# Altium PCB Indicators.PcbDoc
Units mil, origin at the board's own origin, x right, y up, seen from the top; angles counter-clockwise.
Board outline 1725 x 1775 mil, 2 copper layers (Top Layer, Bottom Layer); 24 components, 37 nets, 88 pads, 4 vias.
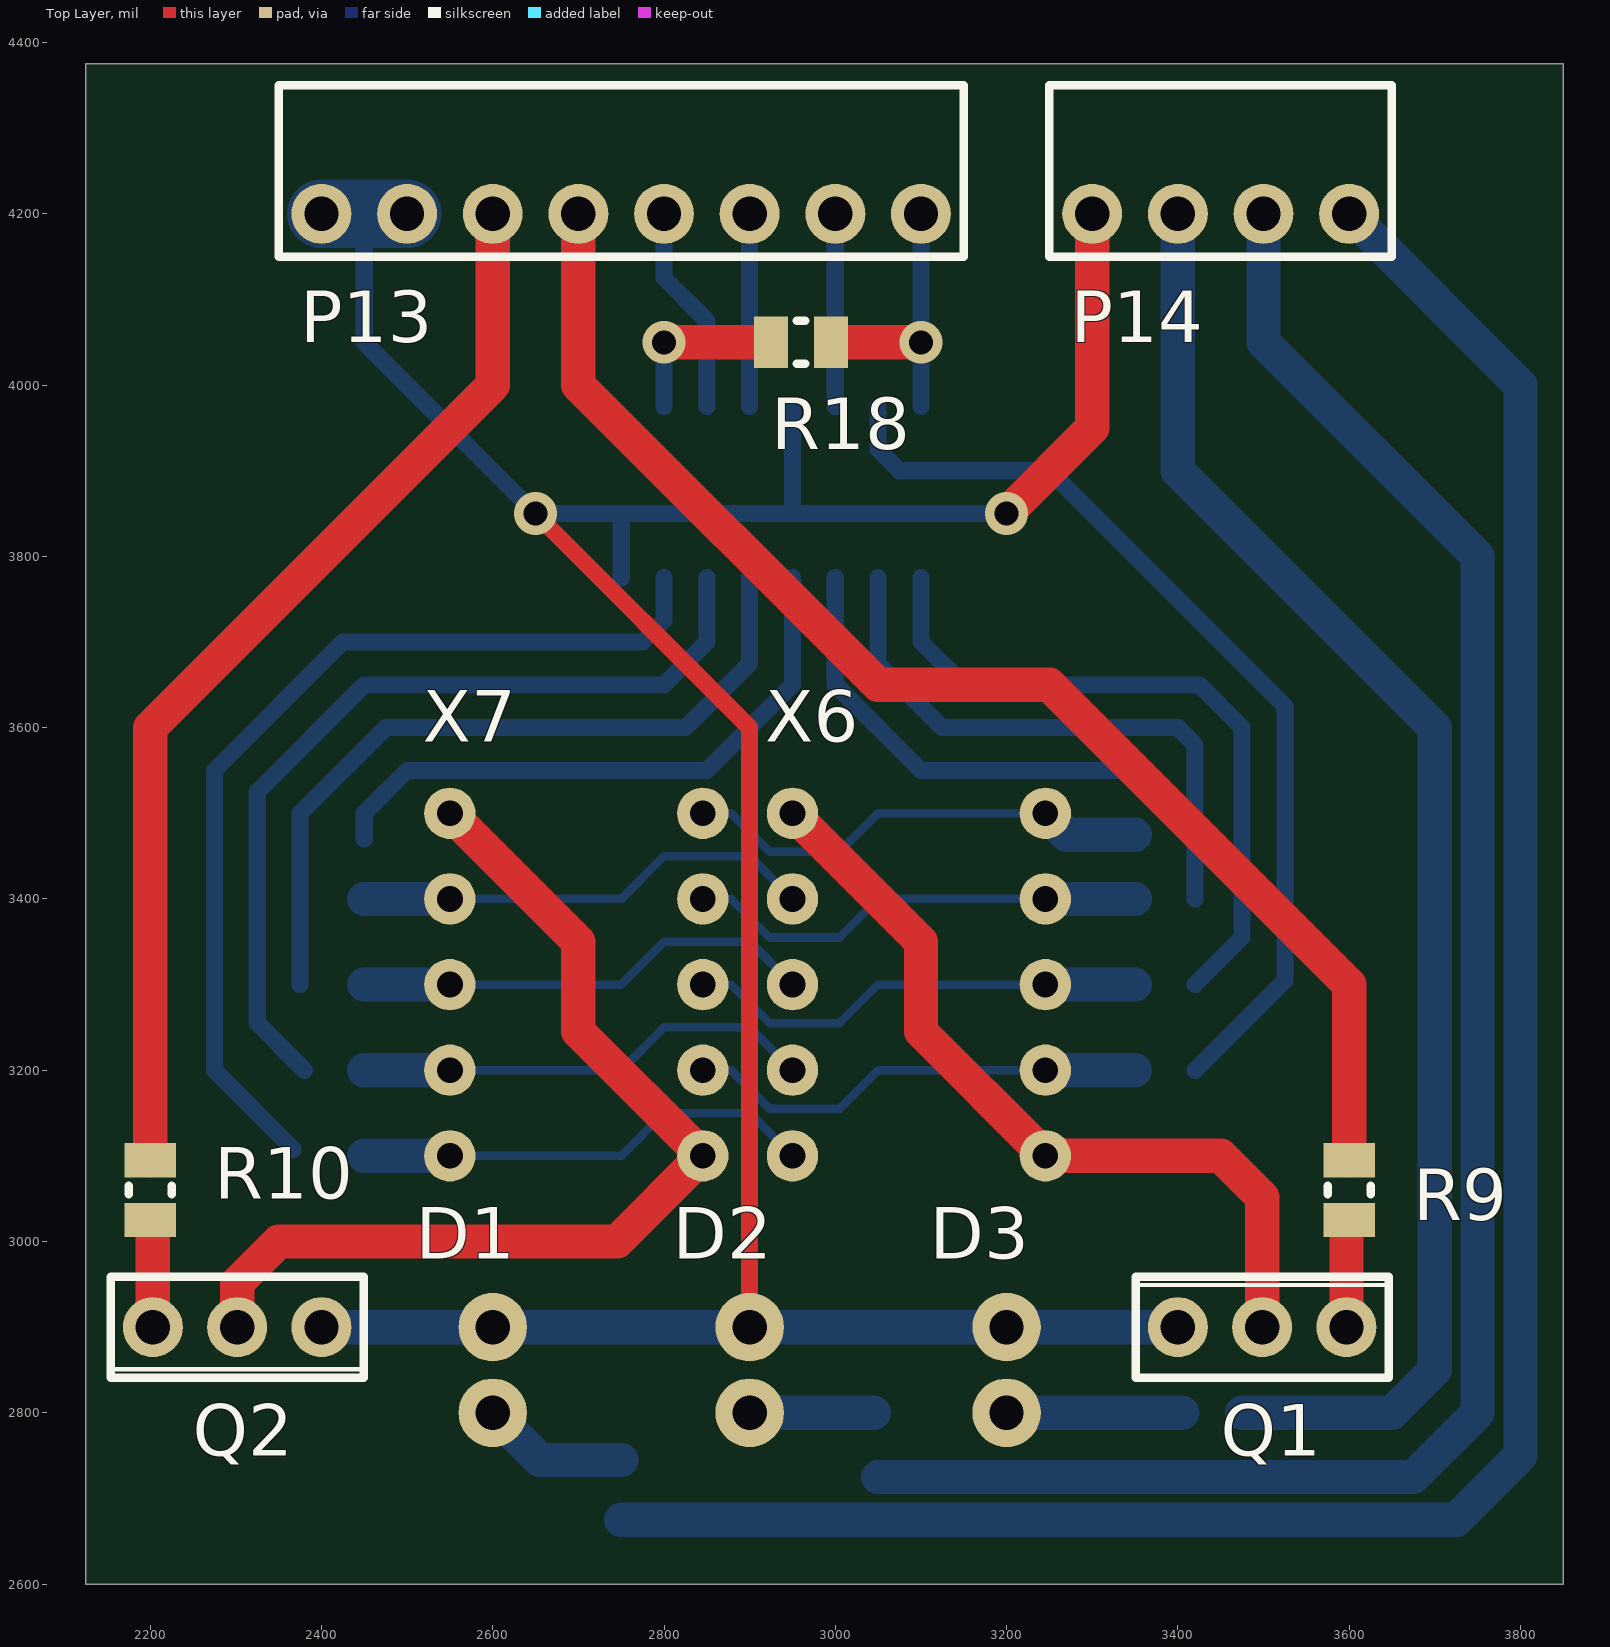
[diagram p0: Top Layer view]
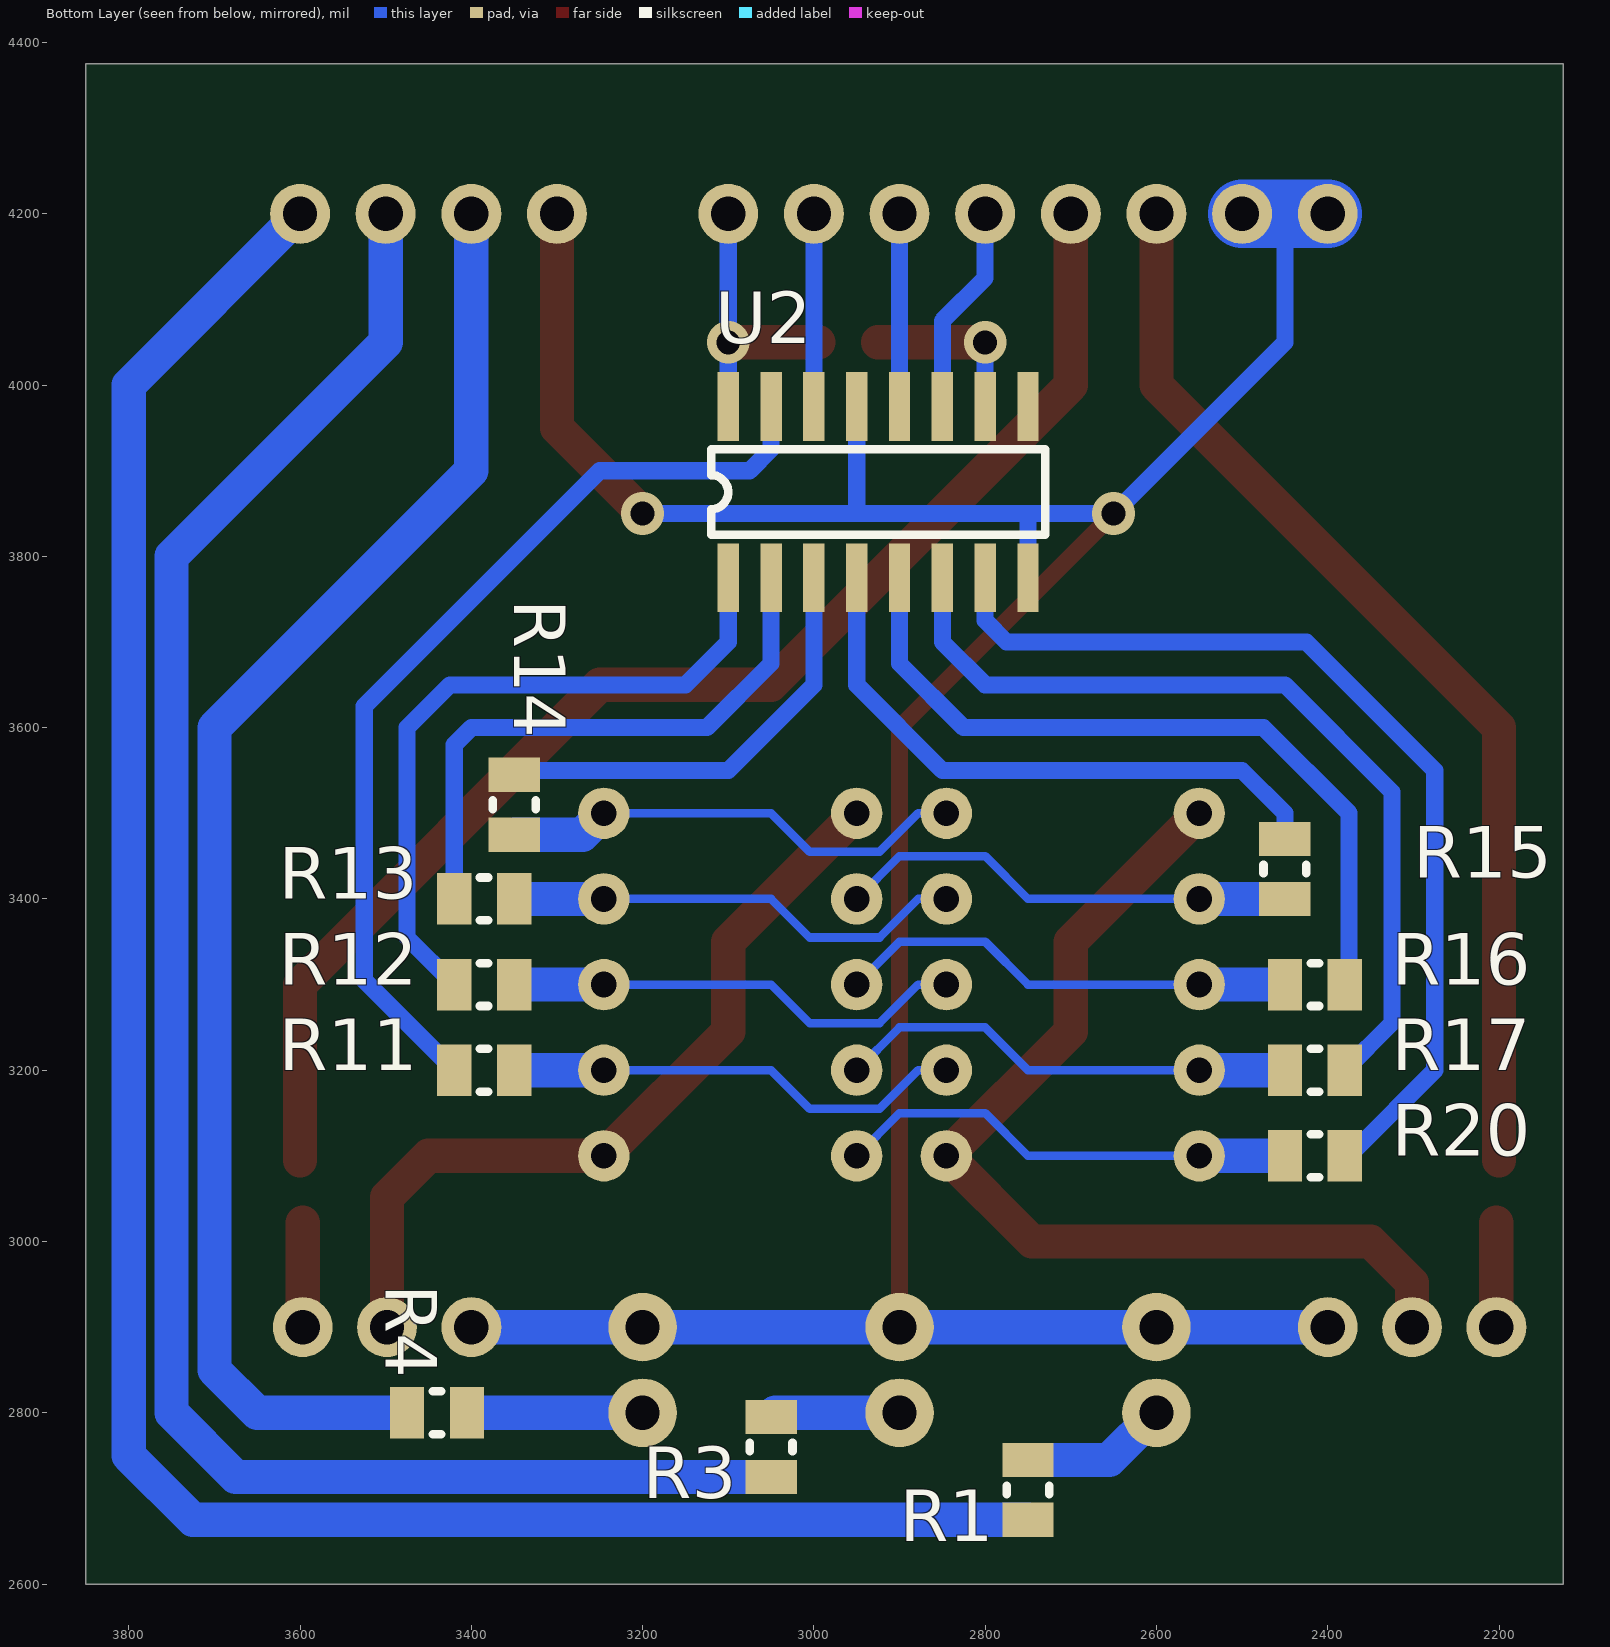
[diagram p1: Bottom Layer view, seen from below]
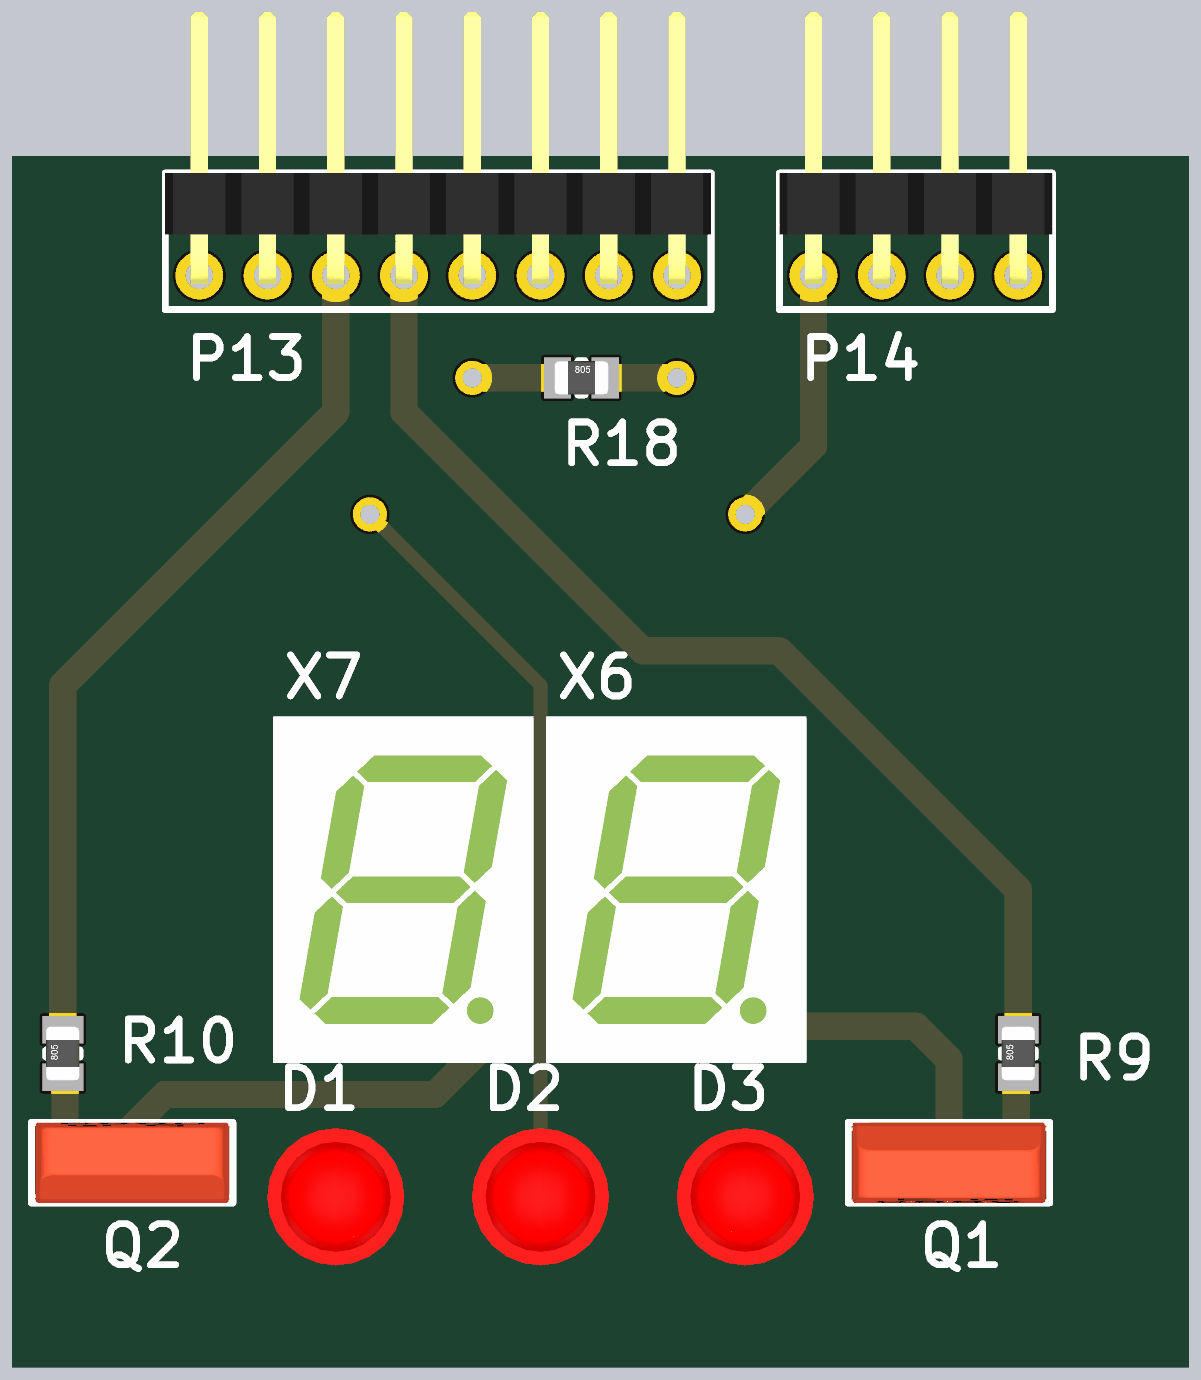
[diagram p2: 3D render of the assembled board from above, using the file's embedded part models]
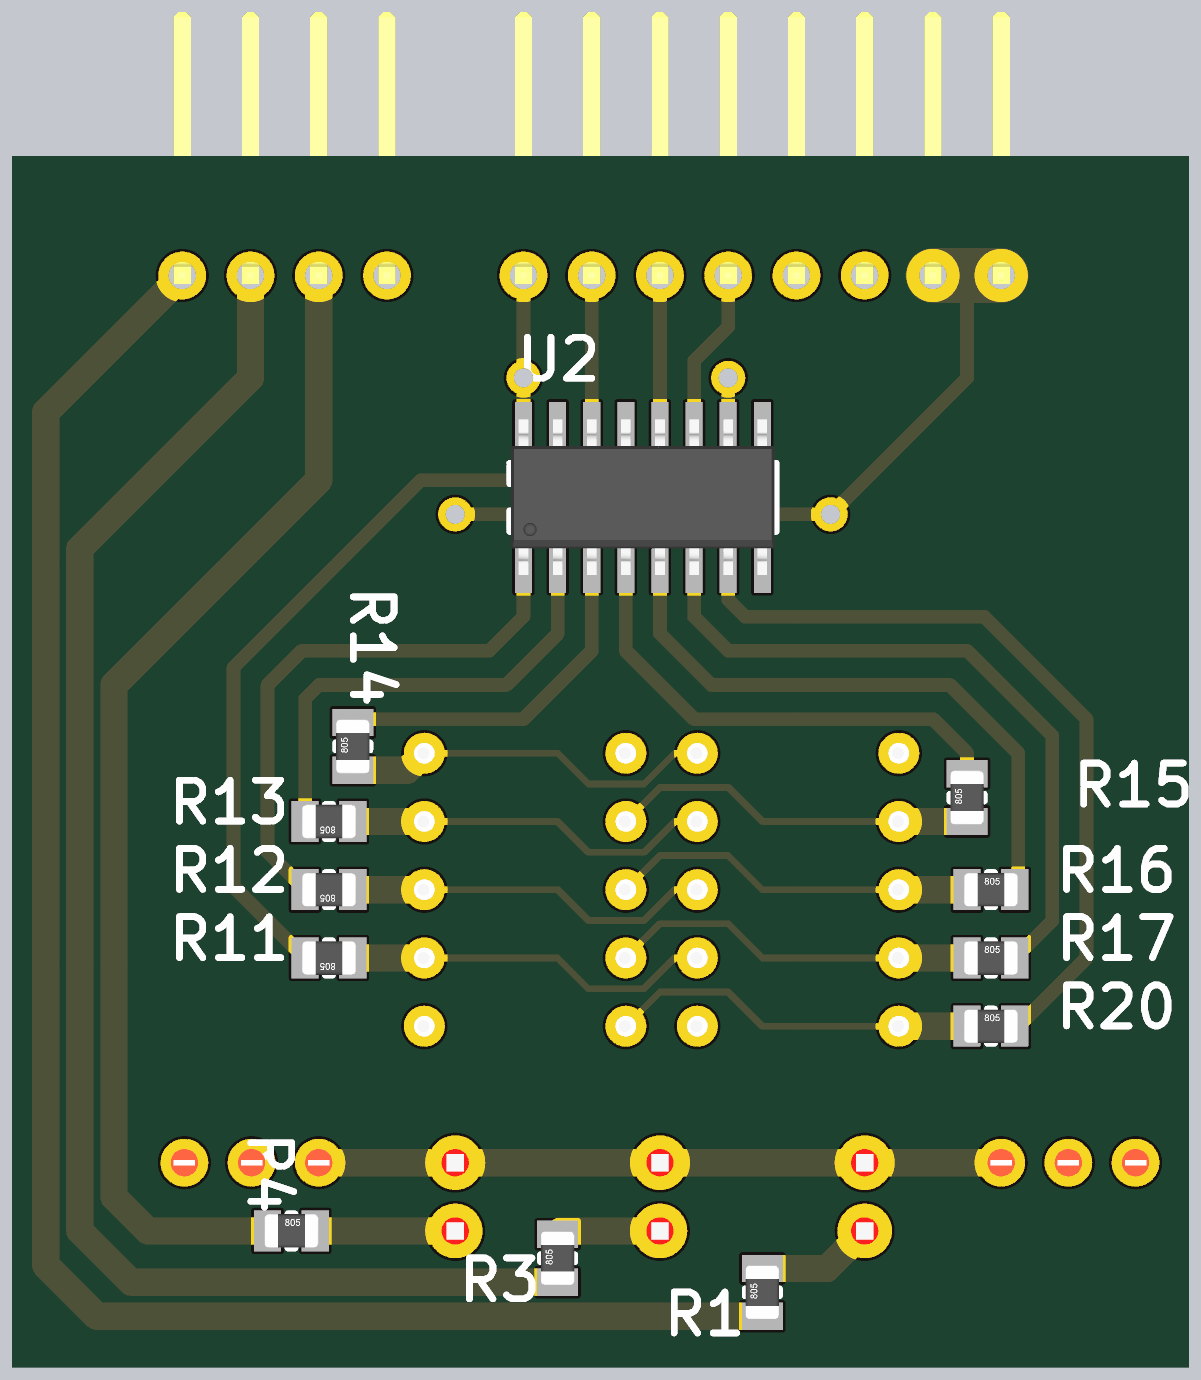
[diagram p3: 3D render of the assembled board from below, using the file's embedded part models]

## Layer stack, top to bottom
Top Solder: solder mask 0.4, Solder Resist, Dk 3.5
Top Layer: signal copper 1.4
Dielectric 1: dielectric 12.6, FR-4, Dk 4.8
Bottom Layer: signal copper 1.4
Bottom Solder: solder mask 0.4, Solder Resist, Dk 3.5

## Board outline
2125,2600 2125,4375 3850,4375 3850,2600

## Design rules (kind name [scope] priority, off if disabled: settings)
Clearance [All] p1: gap=10
PolygonConnect [All] p1: connectstyle=Relief reliefconductorwidth=10 reliefentries=4 polygonreliefangle="90 Angle" airgapwidth=10
RoomDefinition Indicators [InComponentClass('Indicators')] p1 off: confinementstyle=ConfineIn formatcopy=TRUE lockcomponents=FALSE outline 2150,2625 3825,2625 3825,4350 2150,4350
RoutingVias [All] p1: holewidth=28 width=50 viastyle="Through Hole" minholewidth=28 minwidth=50 maxholewidth=28 maxwidth=50
SilkToBoardRegionClearance [All] p1 off:
SolderMaskExpansion [All] p1: expansion=4
Width [All] p1: maxlimit=80 minlimit=10 preferedwidth=40
28 further rules are at their usual default settings.

## Components (designator, comment, footprint, x,y, rotation, side; value= is the part's Value field where it differs from the comment)
D1 "LED" LED 2600,2900 r90 top
D2 "LED" LED 2900,2900 r90 top
D3 "LED" LED 3200,2900 r90 top
P13 "SIL-CONN-8" SIL-CONN-8-R1 3100,4200 r270 top
P14 "SIL-CONN-4" SIL-CONN-4-R1 3600,4200 r270 top
Q1 "KT315" KT315 3400,2900 r0 top
Q2 "KT315" KT315 2400,2900 r180 top
R1 "Resistor" 0805_Resistor 2750,2750 r180 bottom
R3 "Resistor" 0805_Resistor 3050,2800 r180 bottom
R4 "Resistor" 0805_Resistor 3400,2800 r270 bottom
R9 "Resistor" 0805_Resistor 3600,3100 r0 top
R10 "Resistor" 0805_Resistor 2200,3100 r0 top
R11 "Resistor" 0805_Resistor 3425,3200 r90 bottom
R12 "Resistor" 0805_Resistor 3425,3300 r90 bottom
R13 "Resistor" 0805_Resistor 3425,3400 r90 bottom
R14 "Resistor" 0805_Resistor 3350,3550 r180 bottom
R15 "Resistor" 0805_Resistor 2450,3475 r180 bottom
R16 "Resistor" 0805_Resistor 2375,3300 r270 bottom
R17 "Resistor" 0805_Resistor 2375,3200 r270 bottom
R18 "Resistor" 0805_Resistor 3000,4050 r270 top
R20 "Resistor" 0805_Resistor 2375,3100 r270 bottom
U2 "74HC595" SOIC16 3100,3775 r90 bottom
X6 "FYS-3912" FYS-3916 2950,3500 r0 top
X7 "FYS-3912" FYS-3916 2550,3500 r0 top

## Footprints (in the part's own frame and the unit in brackets; to place one, negate y for a bottom-side part, rotate by r counter-clockwise, add the part's x,y. Pads: shape width x height; smd on the part's side, far side on the other; paste and mask are expansions set on the pad)
0805_Resistor [mil]
  rect 60x40 smd: 1(0,-5) 2(0,-75)
  silkscreen extent -25,-45 25,-35, body extent -25,-79 25,-1, height 31
FYS-3916 [mil]
  round 60 hole 30: 1(0,0) 2(0,-100) 3(0,-200) 4(0,-300) 5(0,-400) 6(295.28,-400) 7(295.28,-300) 8(295.28,-200) 9(295.28,-100) 10(295.28,0)
  body extent -42,-454 340,54, height 276
KT315 [mil]
  round 70 hole 40: 1(0,0) 2(98.43,0) 3(196.85,0)
  silkscreen extent -49,-59 246,59, body extent -43,-59 240,59, height 256
LED [mil]
  round 80 hole 40: A(-100,0) K(0,0)
  body extent -150,-100 50,100, height 389
SIL-CONN-4-R1 [mil]
  round 70 hole 40: 1(0,0) 2(0,-100) 3(0,-200) 4(0,-300)
  silkscreen extent -150,-350 50,50, body extent -386,-350 13,50, height 99
SIL-CONN-8-R1 [mil]
  round 70 hole 40: 1(0,0) 2(0,-100) 3(0,-200) 4(0,-300) 5(0,-400) 6(0,-500) 7(0,-600) 8(0,-700)
  silkscreen extent -150,-750 50,50, body extent -386,-750 13,50, height 99
SOIC16 [mil]
  rect 80x25 smd: 1(0,0) 2(0,-50) 3(0,-100) 4(0,-150) 5(0,-200) 6(0,-250) 7(0,-300) 8(0,-350) 9(200,-350) 10(200,-300) 11(200,-250) 12(200,-200) 13(200,-150) 14(200,-100) 15(200,-50) 16(200,0)
  silkscreen extent 50,-370 150,20, body extent -14,-368 214,18, height 69

## Via types
v1: diameter 50, hole 28, Top Layer to Bottom Layer, 4 vias

## Nets (pads, with @x,y where several pads share a name; then routed paths per layer and width w, separated by ;. In a path a pad name is that pad's centre, name@x,y a point inside that pad or via, vN(x,y) a via of type N, cw(c..) or ccw(c..) an arc to the next point about the centre after c; other vN are vias at no path point)
1: P13.5 R9.1 | length 1594.9
  Top Layer w40: P13.5 2700,4000 3050,3650 3250,3650 3600,3300 R9.1
2: P13.6 R10.1 | length 1270.7
  Top Layer w40: R10.1 2200,3600 2600,4000 P13.6
+5: 
+9: 
A: R14.2 X6.10 X7.10 | length 552.4
  Bottom Layer w10: X7.10 2878.28,3500 2923.28,3455 3005,3455 3050,3500 X6.10
  Bottom Layer w40: X6.10 3270.28,3475 R14.2
B: R13.2 X6.9 X7.9 | length 542
  Bottom Layer w10: X7.9 2878.28,3400 2923.28,3355 3005,3355 3050,3400 X6.9
  Bottom Layer w40: X6.9 R13.2
C: R12.2 X6.8 X7.8 | length 542
  Bottom Layer w10: X7.8 2878.28,3300 2923.28,3255 3005,3255 3050,3300 X6.8
  Bottom Layer w40: X6.8 R12.2
CLK: P13.4 U2.11 | length 245.7
  Bottom Layer w20: P13.4 2800,4125 2850,4075 U2.11
D: R20.2 X6.5 X7.5 | length 541.4
  Bottom Layer w10: X7.5 2750,3100 2800,3150 2900,3150 X6.5
  Bottom Layer w40: R20.2 X7.5
DP: R11.2 X6.7 X7.7 | length 542
  Bottom Layer w10: X7.7 2878.28,3200 2923.28,3155 3005,3155 3050,3200 X6.7
  Bottom Layer w40: X6.7 R11.2
DS: P13.2 U2.14 | length 225
  Bottom Layer w20: U2.14 P13.2
E: R17.2 X6.4 X7.4 | length 541.4
  Bottom Layer w10: X7.4 2750,3200 2800,3250 2900,3250 X6.4
  Bottom Layer w40: R17.2 X7.4
F: R15.2 X6.2 X7.2 | length 541.4
  Bottom Layer w10: X7.2 2750,3400 2800,3450 2900,3450 X6.2
  Bottom Layer w40: R15.2 X7.2
G: R16.2 X6.3 X7.3 | length 541.4
  Bottom Layer w10: X7.3 2750,3300 2800,3350 2900,3350 X6.3
  Bottom Layer w40: R16.2 X7.3
GND: D1.K D2.K D3.K P13.7 P13.8 P14.4 Q1.1 Q2.1 U2.8 U2.13 | length 3727.8
  Top Layer w20: v1(2650,3850) 2900,3600 D2.K
  Top Layer w40: v1(3200,3850) 3300,3950 P14.4
  Bottom Layer w20: 2450,4200 2450,4050 v1(2650,3850) 2750,3850 ; U2.8 2750,3850 ; U2.13 2950,3850 ; v1(3200,3850) 2950,3850 ; 2750,3850 2950,3850
  Bottom Layer w40: Q2.1 D1.K D2.K D3.K Q1.1
  Bottom Layer w80: P13.8 2450,4200 P13.7
NetD1_A: D1.A R1.1 | length 172.8
  Bottom Layer w40: D1.A 2655,2745 R1.1
NetD2_A: D2.A R3.1 | length 152.1
  Bottom Layer w10: R3.1@3045,2800 R3.1
  Bottom Layer w40: D2.A R3.1@3045,2800
NetD3_A: D3.A R4.1 | length 205
  Bottom Layer w40: D3.A R4.1
NetP14_1: P14.1 R1.2 | length 2613.9
  Bottom Layer w40: R1.2 3725,2675 3800,2750 3800,4000 P14.1
NetP14_2: P14.2 R3.2 | length 2234.6
  Bottom Layer w40: R3.2 3675,2725 3750,2800 3750,3800 3500,4050 P14.2
NetP14_3: P14.3 R4.2 | length 1720
  Bottom Layer w40: P14.3 3400,3900 3700,3600 3700,2850 3650,2800 R4.2
NetQ1_B: Q1.3 R9.2 | length 121.9
  Top Layer w40: Q1.3 R9.2@3596.85,3021.85
NetQ1_K: Q1.2 X6.1 X6.6 | length 947.1
  Top Layer w40: X6.1 3100,3350 3100,3245.28 X6.6 3450,3100 3498.43,3051.57 Q1.2
NetQ2_B: Q2.3 R10.2 | length 121.9
  Top Layer w40: Q2.3 R10.2@2203.15,3021.85
NetQ2_K: Q2.2 X7.1 X7.6 | length 1179.1
  Top Layer w40: Q2.2 2301.57,2951.57 2350,3000 2745.28,3000 X7.6 2700,3245.28 2700,3350 X7.1
NetR11_1: R11.1 U2.15 | length 1117.8
  Bottom Layer w20: U2.15 3050,3925 3075,3900 3250,3900 3525,3625 3525,3305 R11.1
NetR12_1: R12.1 U2.1 | length 814.2
  Bottom Layer w20: U2.1 3100,3700 3150,3650 3425,3650 3475,3600 3475,3355 R12.1
NetR13_1: R13.1 U2.2 | length 689.4
  Bottom Layer w20: U2.2 3050,3675 3125,3600 3400,3600 3420,3580 R13.1
NetR14_1: R14.1 U2.3 | length 516.4
  Bottom Layer w20: U2.3 3000,3650 3100,3550 R14.1@3350,3550
NetR15_1: R15.1 U2.4 | length 717.1
  Bottom Layer w20: R15.1 2450,3500 2500,3550 2850,3550 2950,3650 U2.4
NetR16_1: R16.1 U2.5 | length 897.5
  Bottom Layer w20: R16.1@2375,3300 2375,3500 2475,3600 2825,3600 2900,3675 U2.5
NetR17_1: R17.1 U2.6 | length 1020.3
  Bottom Layer w20: R17.1 2325,3255 2325,3525 2450,3650 2800,3650 2850,3700 U2.6
NetR18_2: R18.2 U2.10 | length 200
  Top Layer w40: v1(2800,4050) R18.2
  Bottom Layer w20: U2.10 v1(2800,4050)
NetR20_1: R20.1 U2.7 | length 1128.3
  Bottom Layer w20: R20.1@2367.5,3107.5 2275,3200 2275,3550 2425,3700 2775,3700 2800,3725 U2.7
SH1: P13.3 U2.12 | length 225
  Bottom Layer w20: U2.12 P13.3
SH2: 
VCC: P13.1 R18.1 U2.16 | length 330
  Top Layer w40: R18.1 v1(3100,4050)
  Bottom Layer w20: U2.16 v1(3100,4050) P13.1
pads on no net: U2.9

## Silkscreen, mask and mechanical layers (free items; w line width, h text height)
Mechanical 1:
  the board outline again, w10